# Allegro board demoa2_c.brd
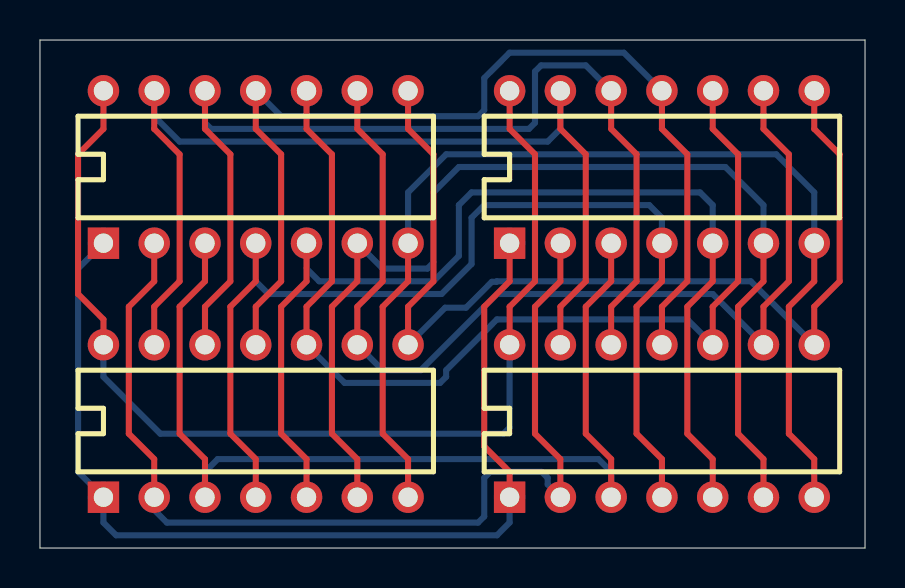
[diagram p0: board, top side]
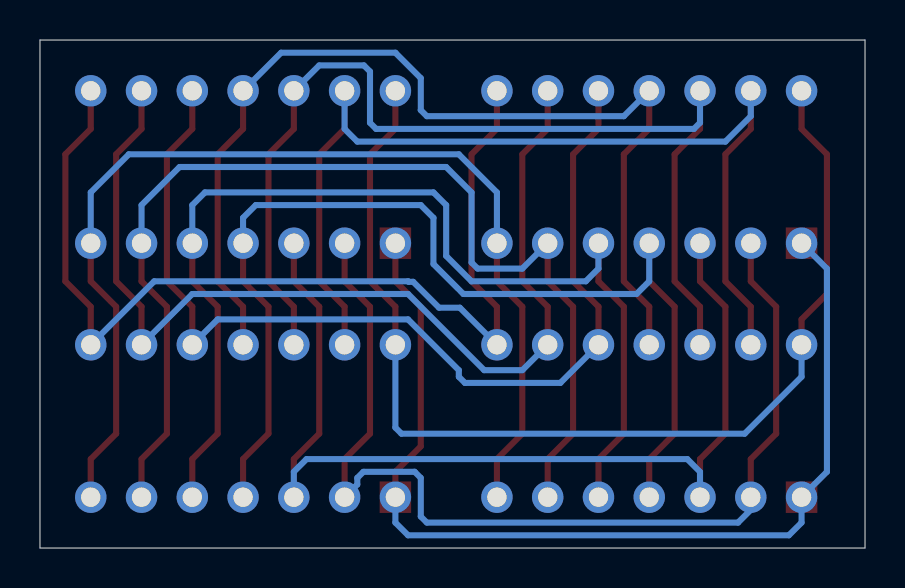
[diagram p1: board, bottom side, seen from below]

Outline 41.27 x 25.4 mm; copper layers: TOP, GND, POWER, INNER1, INNER2, BOTTOM. Coordinates in mm from the lower left corner of the outline.
Outline path: 0,25.4 0,0 41.27,0 41.27,25.4 0,25.4

## Design rules (mm)
nets with their own width: min track width 0.305; nets DAT1 DAT2 DAT3 DAT4 DAT5 DAT6 DAT7 DAT8 DAT9 DAT10 DAT11 DAT12 GND VCC

## Placement (name value [footprint] x y rotation side)
U1  7400  [DIP14]  3.17 15.24 0 top
U2  7400  [DIP14]  23.5 15.24 0 top
U3  7400  [DIP14]  3.17 2.54 0 top
U4  7400  [DIP14]  23.5 2.54 0 top

## Library data of the parts
U1-U4 = 7400

## Footprints (pads in the part's own frame, mm; a bottom-side part is the same pattern mirrored in y, then rotated)
DIP14
  rect 1.575x1.575 hole 0.965: 1(0,0)
  round 1.575 hole 0.965: 2(2.54,0) 3(5.08,0) 4(7.62,0) 5(10.16,0) 6(12.7,0) 7(15.24,0) 8(15.24,7.62) 9(12.7,7.62) 10(10.16,7.62) 11(7.62,7.62) 12(5.08,7.62) 13(2.54,7.62) 14(0,7.62)

## Nets
GND: U1.7(TP-7) U2.7(TP-7) U3.7(TP-7) U4.7(TP-7)
VCC: U1.14(TP-14) U2.14(TP-14) U3.14(TP-14) U4.14(TP-14)
DAT1: U1.2(TP-2) U2.2(TP-2) U3.2(TP-2) U4.2(TP-2)
DAT2: U1.1(TP-1) U2.1(TP-1) U3.1(TP-1) U4.1(TP-1)
DAT3: U1.3(TP-3) U2.3(TP-3) U3.3(TP-3) U4.3(TP-3)
DAT4: U1.5(TP-5) U2.5(TP-5) U3.5(TP-5) U4.5(TP-5)
DAT5: U1.4(TP-4) U2.4(TP-4) U3.4(TP-4) U4.4(TP-4)
DAT6: U1.6(TP-6) U2.6(TP-6) U3.6(TP-6) U4.6(TP-6)
DAT7: U1.10(TP-10) U2.10(TP-10) U3.10(TP-10) U4.10(TP-10)
DAT8: U1.9(TP-9) U2.9(TP-9) U3.9(TP-9) U4.9(TP-9)
DAT9: U1.8(TP-8) U2.8(TP-8) U3.8(TP-8) U4.8(TP-8)
DAT10: U1.13(TP-13) U2.13(TP-13) U3.13(TP-13) U4.13(TP-13)
DAT11: U1.12(TP-12) U2.12(TP-12) U3.12(TP-12) U4.12(TP-12)
DAT12: U1.11(TP-11) U2.11(TP-11) U3.11(TP-11) U4.11(TP-11)

## Routing (per net, layer and track width the routed paths; a pad name or vN(x,y) marks a point on that pad's centre or on a via; arc(x,y) is an arc through that point)
GND: length 54.5
  TOP w0.305: U4.7 38.73,4.45 37.46,5.71 37.46,12.06 38.73,13.34 U2.7 ; U1.7 18.42,13.34 17.15,12.06 17.15,5.71 18.42,4.45 U3.7
  BOTTOM w0.305: U1.7 18.42,17.78 20.32,19.68 36.83,19.68 38.73,17.78 U2.7
VCC: length 54.9
  TOP w0.305: U1.14 3.17,20.95 1.91,19.68 1.91,12.7 3.17,11.43 U3.14 ; U4.14 23.5,12.06 24.77,13.34 24.77,19.68 23.5,20.95 U2.14
  BOTTOM w0.305: U3.14 3.17,8.56 6.02,5.71 23.19,5.71 23.5,6.02 U4.14
DAT1: length 51.6
  TOP w0.305: U3.2 5.71,4.45 4.45,5.71 4.45,12.06 5.71,13.34 U1.2 ; U2.2 26.04,13.34 24.77,12.06 24.77,5.71 26.04,4.45 U4.2
  BOTTOM w0.305: U4.2 25.4,3.17 25.4,3.51 25.1,3.81 22.53,3.81 22.23,3.51 22.23,1.57 21.92,1.27 6.35,1.27 5.71,1.91 U3.2
DAT2: length 50.9
  TOP w0.305: U4.1 23.5,3.81 22.23,5.08 22.23,12.06 23.5,13.34 U2.1
  BOTTOM w0.305: U4.1 23.5,1.27 22.86,0.64 3.81,0.64 3.17,1.27 U3.1 1.91,3.81 1.91,13.97 U1.1
DAT3: length 50.9
  TOP w0.305: U1.3 8.26,13.34 6.98,12.06 6.98,5.71 8.26,4.45 U3.3 ; U2.3 28.58,13.34 27.31,12.06 27.31,5.71 28.58,4.45 U4.3
  BOTTOM w0.305: U3.3 8.26,3.81 8.89,4.45 27.94,4.45 28.58,3.81 U4.3
DAT4: length 54.9
  TOP w0.305: U3.5 13.33,4.45 12.06,5.71 12.06,12.06 13.33,13.34 U1.5 ; U2.5 33.66,13.34 32.38,12.06 32.38,5.71 33.66,4.45 U4.5
  BOTTOM w0.305: U1.5 13.33,13.97 13.97,13.34 19.69,13.34 20.96,14.61 20.96,17.14 21.59,17.78 33.02,17.78 33.66,17.14 U2.5
DAT5: length 54.7
  TOP w0.305: U4.4 31.12,4.45 29.85,5.71 29.85,12.06 31.12,13.34 U2.4 ; U1.4 10.79,13.34 9.53,12.06 9.53,5.71 10.79,4.45 U3.4
  BOTTOM w0.305: U1.4 10.79,13.34 11.43,12.7 20.09,12.7 21.59,14.2 21.59,16.51 22.23,17.14 30.48,17.14 31.12,16.51 U2.4
DAT6: length 55.2
  TOP w0.305: U1.6 15.88,13.34 14.61,12.06 14.61,5.71 15.88,4.45 U3.6 ; U2.6 36.2,13.34 34.92,12.06 34.92,5.71 36.2,4.45 U4.6
  BOTTOM w0.305: U2.6 36.2,17.14 34.29,19.05 20.96,19.05 19.69,17.78 19.69,14.27 19.38,13.97 17.15,13.97 U1.6
DAT7: length 50.6
  TOP w0.305: U1.10 13.33,20.95 14.61,19.68 14.61,13.34 13.33,12.06 U3.10 ; U4.10 33.66,12.06 34.92,13.34 34.92,19.68 33.66,20.95 U2.10
  BOTTOM w0.305: U3.10 15.24,8.26 20.02,8.26 20.32,8.56 20.32,8.89 22.86,11.43 32.38,11.43 U4.10
DAT8: length 51
  TOP w0.305: U3.9 15.88,12.06 17.15,13.34 17.15,19.68 15.88,20.95 U1.9 ; U2.9 36.2,20.95 37.46,19.68 37.46,13.34 36.2,12.06 U4.9
  BOTTOM w0.305: U4.9 33.66,12.7 22.86,12.7 19.05,8.89 17.15,8.89 U3.9
DAT9: length 50.5
  TOP w0.305: U2.8 38.73,20.95 40,19.68 40,13.34 38.73,12.06 U4.8 ; U1.8 18.42,20.95 19.69,19.68 19.69,13.34 18.42,12.06 U3.8
  BOTTOM w0.305: U3.8 20.27,12.01 21.31,12.01 22.61,13.31 22.83,13.31 22.86,13.34 35.56,13.34 U4.8
DAT10: length 51.8
  TOP w0.305: U2.13 26.04,20.95 27.31,19.68 27.31,13.34 26.04,12.06 U4.13 ; U3.13 5.71,12.06 6.98,13.34 6.98,19.68 5.71,20.95 U1.13
  BOTTOM w0.305: U2.13 26.04,20.95 25.4,20.32 6.98,20.32 5.71,21.59 U1.13
DAT11: length 52.9
  TOP w0.305: U2.12 28.58,20.95 29.85,19.68 29.85,13.34 28.58,12.06 U4.12 ; U1.12 8.26,20.95 9.53,19.68 9.53,13.34 8.26,12.06 U3.12
  BOTTOM w0.305: U2.12 27.31,24.13 25.07,24.13 24.77,23.83 24.77,21.26 24.46,20.95 8.56,20.95 8.26,21.26 U1.12
DAT12: length 51.4
  TOP w0.305: U4.11 31.12,12.06 32.38,13.34 32.38,19.68 31.12,20.95 U2.11 ; U3.11 10.79,12.06 12.06,13.34 12.06,19.68 10.79,20.95 U1.11
  BOTTOM w0.305: U1.11 12.06,21.59 21.92,21.59 22.23,21.89 22.23,23.5 23.5,24.77 29.21,24.77 U2.11
